# Allegro board dividers.brd
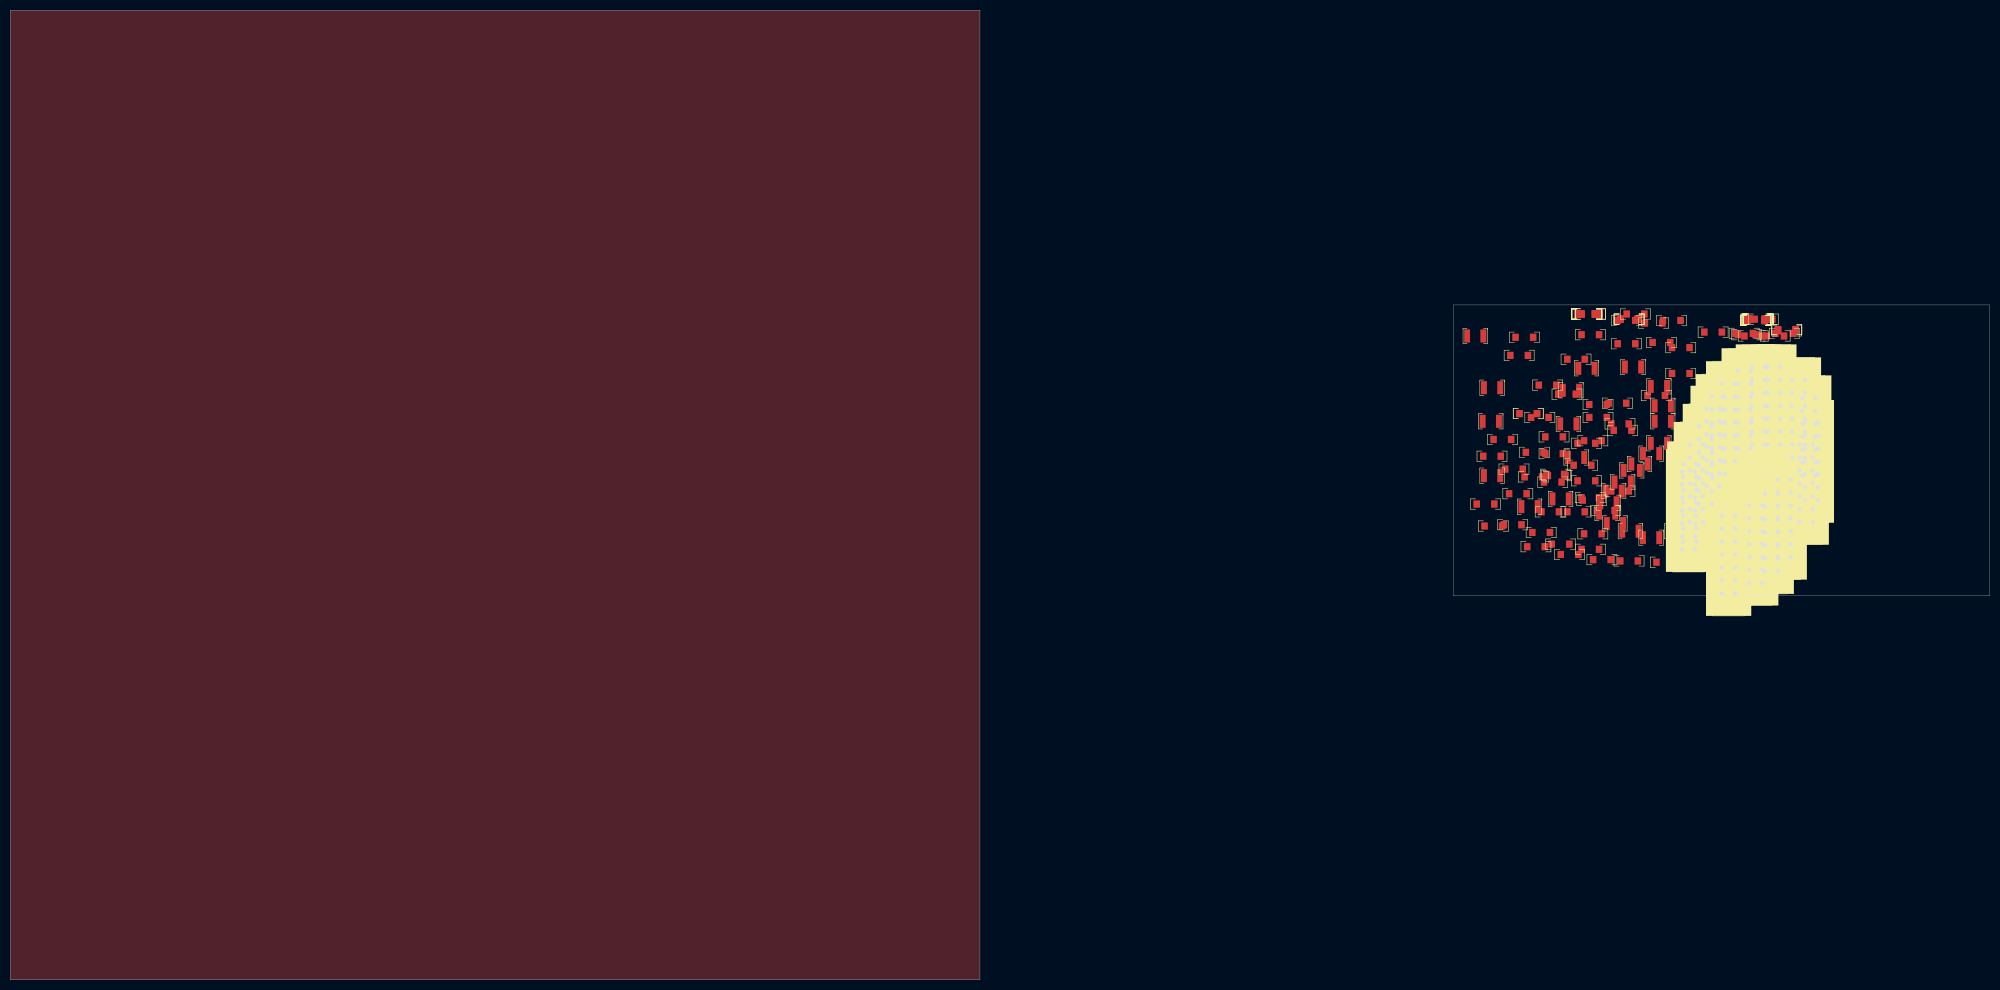
[diagram p0: board, top side]
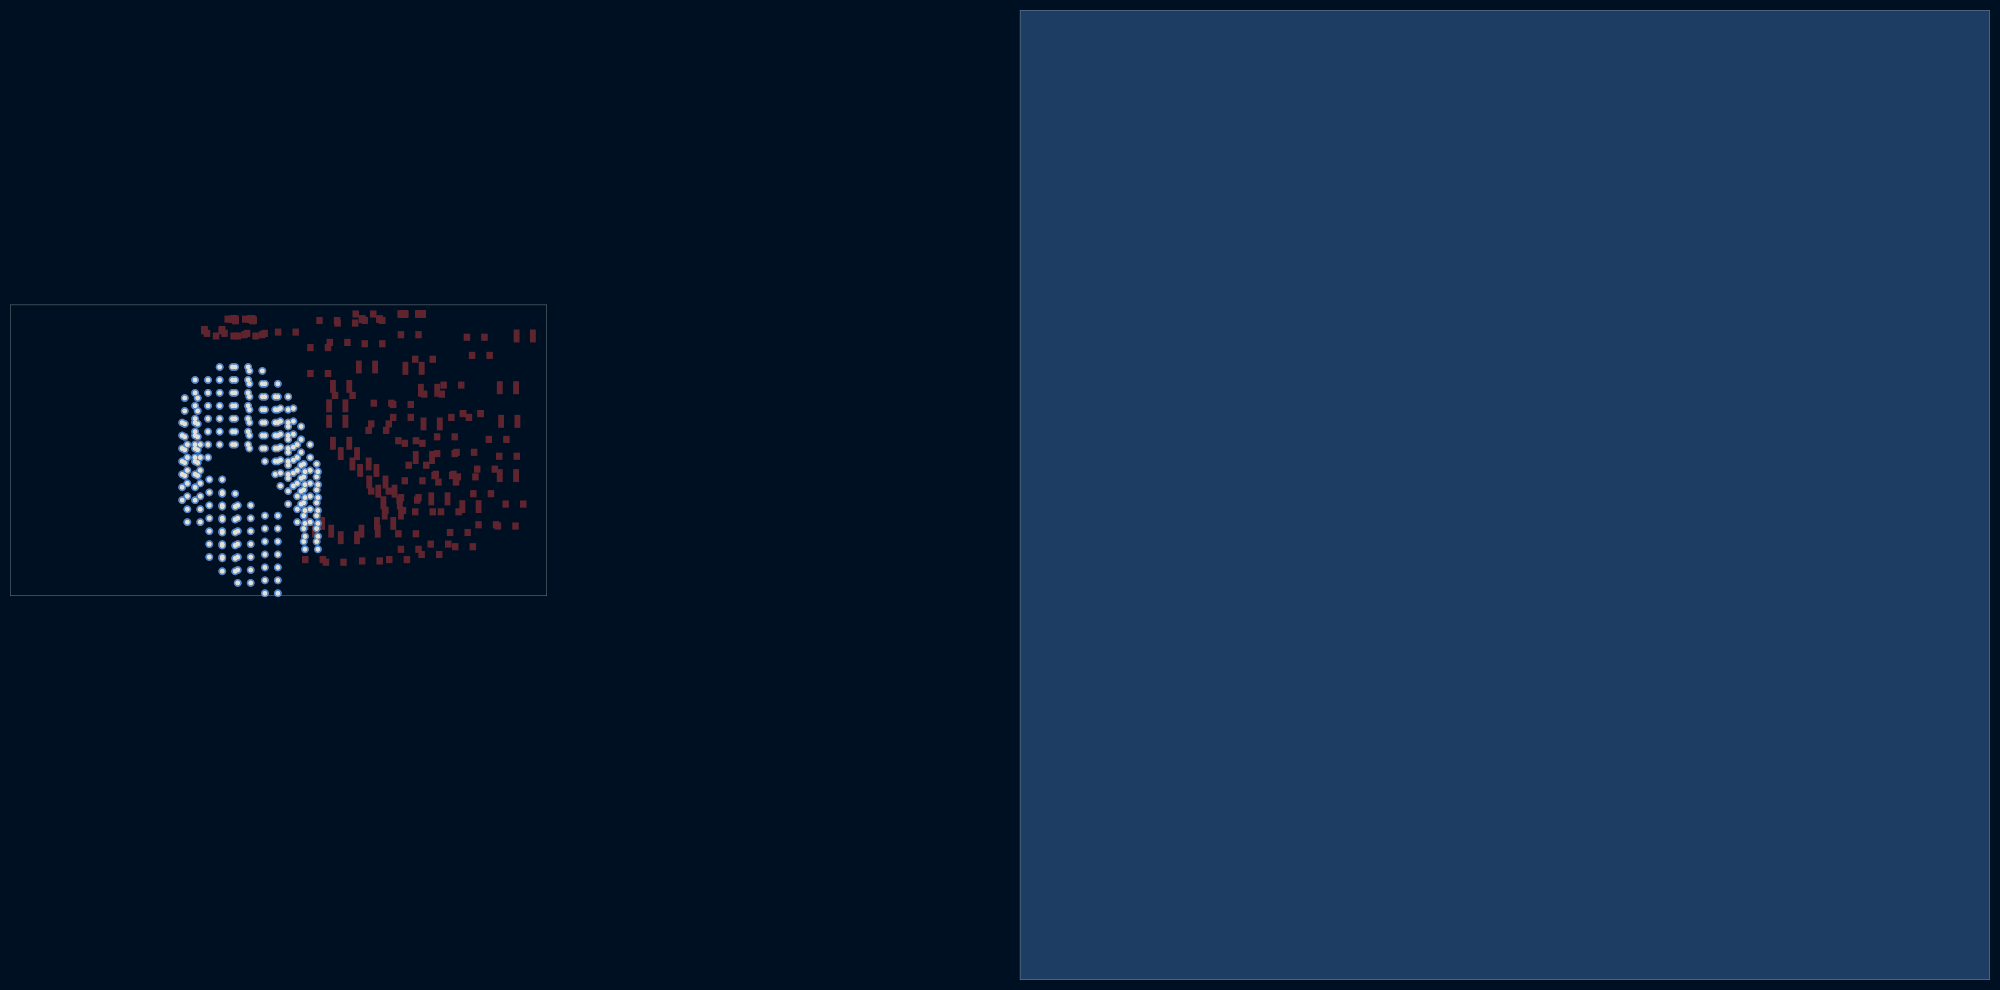
[diagram p1: board, bottom side, seen from below]

Outline 388.87 x 190.5 mm; copper layers: TOP, BOTTOM. Coordinates in mm from the lower left corner of the outline.
Outline path: 0,190.5 190.5,190.5 190.5,0 0,0 0,190.5 ; 283.46,132.59 283.46,75.44 388.87,75.44 388.87,132.59 283.46,132.59

## Placement (name value [footprint] x y rotation side)
C1_1  0.022UF  [C1210]  287.78 126.49 0 top
C1_2  0.022UF  [C1210]  291.08 116.33 0 top
C1_3  0.022UF  [C1210]  290.83 109.73 0 top
C1_4  0.022UF  [C1210]  291.08 99.06 0 top
C1_5  0.022UF  [C1210]  298.45 92.96 0 top
C1_6  0.022UF  [C1210]  304.55 94.49 0 top
C1_7  0.022UF  [C1210]  307.59 102.62 0 top
C1_8  0.022UF  [C1210]  306.07 109.22 0 top
C1_9  0.022UF  [C1210]  306.58 115.82 0 top
C2_1  0.022UF  [C1210]  309.63 120.14 0 top
C2_2  0.022UF  [C1210]  318.77 120.4 0 top
C2_3  0.022UF  [C1210]  323.85 116.59 0 top
C2_4  0.022UF  [C1210]  324.61 112.78 0 top
C2_5  0.022UF  [C1210]  324.61 109.73 0 top
C2_6  0.022UF  [C1210]  323.85 105.41 0 top
C2_7  0.022UF  [C1210]  322.33 103.38 0 top
C2_8  0.022UF  [C1210]  320.04 101.35 0 top
C2_9  0.022UF  [C1210]  318.52 100.08 0 top
C3_1  0.022UF  [C1210]  316.74 97.79 0 top
C3_2  0.022UF  [C1210]  314.96 96.01 0 top
C3_3  0.022UF  [C1210]  313.94 93.73 0 top
C3_4  0.022UF  [C1210]  313.69 91.69 0 top
C3_5  0.022UF  [C1210]  315.21 89.66 0 top
C3_6  0.022UF  [C1210]  318.26 88.14 0 top
C3_7  0.022UF  [C1210]  322.33 86.87 0 top
C3_8  0.022UF  [C1210]  327.41 88.14 0 top
C3_9  0.022UF  [C1210]  329.18 89.66 0 top
J1_1  -  [HDR14]  329.69 92.2 0 top
J1_2  -  [HDR14]  329.95 93.73 0 top
J1_3  -  [HDR14]  331.22 97.54 0 top
J1_4  -  [HDR14]  332.99 101.09 0 top
J1_5  -  [HDR14]  334.52 104.65 0 top
J1_6  -  [HDR14]  335.53 106.93 0 top
J1_7  -  [HDR14]  337.57 109.47 0 top
J1_8  -  [HDR14]  340.61 112.01 0 top
J1_9  -  [HDR14]  343.41 112.78 0 top
J2_1  -  [HDR14]  346.46 112.78 0 top
J2_2  -  [HDR14]  351.28 110.24 0 top
J2_3  -  [HDR14]  353.31 106.68 0 top
J2_4  -  [HDR14]  353.82 101.85 0 top
J2_5  -  [HDR14]  352.81 97.54 0 top
J2_6  -  [HDR14]  348.49 90.68 0 top
J2_7  -  [HDR14]  345.95 87.88 0 top
J2_8  -  [HDR14]  342.9 85.6 0 top
J2_9  -  [HDR14]  337.57 83.57 0 top
R1_1  390K  [R1206]  303.02 97.79 0 top
R1_2  390K  [R1206]  303.28 106.68 0 top
R1_3  390K  [R1206]  300.48 110.49 0 top
R1_4  390K  [R1206]  298.2 111.25 0 top
R1_5  390K  [R1206]  305.82 115.06 0 top
R1_6  390K  [R1206]  296.42 122.68 0 top
R1_7  390K  [R1206]  297.43 126.24 0 top
R1_8  390K  [R1206]  310.39 126.75 0 top
R1_9  390K  [R1206]  322.83 129.03 0 top
R2_1  1.44M  [R1206]  326.39 129.54 0 top
R2_2  1.44M  [R1206]  334.52 127.25 0 top
R2_3  1.44M  [R1206]  340.61 127 0 top
R2_4  1.44M  [R1206]  341.12 126.75 0 top
R2_5  1.44M  [R1206]  342.39 126.49 0 top
R2_6  1.44M  [R1206]  346.71 126.49 0 top
R2_7  1.44M  [R1206]  348.49 127 0 top
R2_8  1.44M  [R1206]  349 127.51 0 top
R2_9  1.44M  [R1206]  349 127.76 0 top
R3_1  1M  [R1206]  349 127.76 0 top
R3_2  1M  [R1206]  344.42 129.79 0 top
R3_3  1M  [R1206]  343.41 129.79 0 top
R3_4  1M  [R1206]  343.41 129.79 0 top
R3_5  1M  [R1206]  343.41 129.79 0 top
R3_6  1M  [R1206]  343.41 129.79 0 top
R3_7  1M  [R1206]  343.15 129.79 0 top
R3_8  1M  [R1206]  343.15 129.79 0 top
R3_9  1M  [R1206]  343.15 129.79 0 top
R4_1  450K  [R1206]  343.15 129.79 0 top
R4_2  450K  [R1206]  342.9 129.79 0 top
R4_3  450K  [R1206]  343.15 129.79 0 top
R4_4  450K  [R1206]  343.15 129.79 0 top
R4_5  450K  [R1206]  342.9 129.54 0 top
R4_6  450K  [R1206]  342.9 129.54 0 top
R4_7  450K  [R1206]  342.9 129.54 0 top
R4_8  450K  [R1206]  342.9 129.54 0 top
R4_9  450K  [R1206]  342.9 129.54 0 top
R5_1  450K  [R1206]  342.9 129.54 0 top
R5_2  450K  [R1206]  342.9 129.54 0 top
R5_3  450K  [R1206]  342.9 129.54 0 top
R5_4  450K  [R1206]  342.9 129.54 0 top
R5_5  450K  [R1206]  342.9 129.54 0 top
R5_6  450K  [R1206]  342.9 129.54 0 top
R5_7  450K  [R1206]  342.9 129.54 0 top
R5_8  450K  [R1206]  342.9 129.54 0 top
R5_9  450K  [R1206]  342.9 129.54 0 top
R6_1  300K  [R1206]  342.9 129.54 0 top
R6_2  300K  [R1206]  342.9 129.54 0 top
R6_3  300K  [R1206]  342.9 129.54 0 top
R6_4  300K  [R1206]  342.9 129.54 0 top
R6_5  300K  [R1206]  342.9 129.54 0 top
R6_6  300K  [R1206]  342.9 129.54 0 top
R6_7  300K  [R1206]  342.9 129.54 0 top
R6_8  300K  [R1206]  309.88 130.81 0 top
R6_9  300K  [R1206]  309.63 130.81 0 top
R7_1  300K  [R1206]  309.63 130.81 0 top
R7_2  300K  [R1206]  309.63 130.81 0 top
R7_3  300K  [R1206]  309.63 130.81 0 top
R7_4  300K  [R1206]  309.63 130.81 0 top
R7_5  300K  [R1206]  309.63 130.81 0 top
R7_6  300K  [R1206]  309.63 130.81 0 top
R7_7  300K  [R1206]  309.63 130.81 0 top
R7_8  300K  [R1206]  309.63 130.81 0 top
R7_9  300K  [R1206]  309.63 130.81 0 top
R8_1  300K  [R1206]  309.63 130.81 0 top
R8_2  300K  [R1206]  309.63 130.81 0 top
R8_3  300K  [R1206]  309.63 130.81 0 top
R8_4  300K  [R1206]  309.63 130.81 0 top
R8_5  300K  [R1206]  309.63 130.81 0 top
R8_6  300K  [R1206]  309.63 130.81 0 top
R8_7  300K  [R1206]  309.63 130.81 0 top
R8_8  300K  [R1206]  309.63 130.81 0 top
R8_9  300K  [R1206]  309.63 130.81 0 top
R9_1  51  [R1206]  310.39 130.81 0 top
R9_2  51  [R1206]  310.39 130.81 0 top
R9_3  51  [R1206]  310.39 130.81 0 top
R9_4  51  [R1206]  317.5 129.54 0 top
R9_5  51  [R1206]  318.01 129.79 0 top
R9_6  51  [R1206]  318.01 129.79 0 top
R9_7  51  [R1206]  318.01 129.79 0 top
R9_8  51  [R1206]  318.01 129.79 0 top
R9_9  51  [R1206]  319.28 130.81 0 top
R10_1  300K  [R1206]  329.18 82.55 0 top
R10_2  300K  [R1206]  325.12 82.04 0 top
R10_3  300K  [R1206]  318.01 82.3 0 top
R10_4  300K  [R1206]  312.67 82.55 0 top
R10_5  300K  [R1206]  306.32 83.57 0 top
R10_6  300K  [R1206]  299.72 85.09 0 top
R10_7  300K  [R1206]  291.34 89.15 0 top
R10_8  300K  [R1206]  289.81 93.47 0 top
R10_9  300K  [R1206]  291.08 102.87 0 top
R11_1  51  [R1206]  293.12 106.17 0 top
R11_2  51  [R1206]  298.2 111.25 0 top
R11_3  51  [R1206]  302.01 116.84 0 top
R11_4  51  [R1206]  307.59 121.92 0 top
R11_5  51  [R1206]  317.5 124.97 0 top
R11_6  51  [R1206]  324.36 125.22 0 top
R11_7  51  [R1206]  328.17 124.21 0 top
R11_8  51  [R1206]  328.17 119.13 0 top
R11_9  51  [R1206]  323.34 114.81 0 top
R12_1  300K  [R1206]  315.72 113.28 0 top
R12_2  300K  [R1206]  311.91 113.03 0 top
R12_3  300K  [R1206]  311.91 110.49 0 top
R12_4  300K  [R1206]  316.23 109.22 0 top
R12_5  300K  [R1206]  316.74 107.95 0 top
R12_6  300K  [R1206]  310.9 105.92 0 top
R12_7  300K  [R1206]  309.63 105.41 0 top
R12_8  300K  [R1206]  299.47 103.63 0 top
R12_9  300K  [R1206]  295.4 100.33 0 top
R13_1  51  [R1206]  296.16 95.5 0 top
R13_2  51  [R1206]  302.51 91.95 0 top
R13_3  51  [R1206]  310.9 87.63 0 top
R13_4  51  [R1206]  310.39 84.58 0 top
R13_5  51  [R1206]  304.55 85.6 0 top
R13_6  51  [R1206]  300.74 87.88 0 top
R13_7  51  [R1206]  295.15 89.41 0 top
R13_8  51  [R1206]  299.21 98.81 0 top
R13_9  51  [R1206]  303.28 103.38 0 top
R14_1  300K  [R1206]  303.53 99.31 0 top
R14_2  300K  [R1206]  303.78 99.06 0 top
R14_3  300K  [R1206]  316.23 96.01 0 top
R14_4  300K  [R1206]  313.44 92.2 0 top
R14_5  300K  [R1206]  309.63 98.04 0 top
R14_6  300K  [R1206]  308.86 101.09 0 top
R14_7  300K  [R1206]  307.59 91.95 0 top
R14_8  300K  [R1206]  310.64 94.23 0 top
R14_9  300K  [R1206]  310.39 94.74 0 top

## Library data of the parts
C1_1-C1_9 C2_1-C2_9 C3_1-C3_9 = CSMD1210: alternate symbols: (C1206); part number: CSMD1210-0.022UF,20%,1210,2KV
J1_1-J1_9 J2_1-J2_9 = CONN14
R1_1-R1_9 = RSMD1206: part number: RSMD1206-390K,5%,1206
R2_1-R2_9 = RSMD1206: part number: RSMD1206-1.44M,5%,1206
R3_1-R3_9 = RSMD1206: part number: RSMD1206-1M,5%,1206
R4_1-R4_9 R5_1-R5_9 = RSMD1206: part number: RSMD1206-450K,5%,1206
R6_1-R6_9 R7_1-R7_9 R8_1-R8_9 R10_1-R10_9 R12_1-R12_9 R14_1-R14_9 = RSMD1206: part number: RSMD1206-300K,5%,1206
R9_1-R9_9 R11_1-R11_9 R13_1-R13_9 = RSMD1206: part number: RSMD1206-51,5%,1206

## Footprints (pads in the part's own frame, mm; a bottom-side part is the same pattern mirrored in y, then rotated)
C1210
  rect 1.143x2.54 smd: 1(-1.587,0) 2(1.612,0)
HDR14
  round 1.524 hole 0.889: 1(-1.27,7.62) 2(1.27,7.62) 3(-1.27,5.08) 4(1.27,5.08) 5(-1.27,2.54) 6(1.27,2.54) 7(-1.27,0) 8(1.27,0) 9(-1.27,-2.54) 10(1.27,-2.54) 11(-1.27,-5.08) 12(1.27,-5.08) 13(-1.27,-7.62) 14(1.27,-7.62)
R1206
  rect 1.27x1.397 smd: 1(-1.727,0) 2(1.727,0)

## Nets
GND_1: C3_1.2(B<0>) J1_1.14 J2_1.14 R14_1.2(B<0>)
GND_2: C3_2.2(B<0>) J1_2.14 J2_2.14 R14_2.2(B<0>)
GND_3: C3_3.2(B<0>) J1_3.14 J2_3.14 R14_3.2(B<0>)
GND_4: C3_4.2(B<0>) J1_4.14 J2_4.14 R14_4.2(B<0>)
GND_5: C3_5.2(B<0>) J1_5.14 J2_5.14 R14_5.2(B<0>)
GND_6: C3_6.2(B<0>) J1_6.14 J2_6.14 R14_6.2(B<0>)
GND_7: C3_7.2(B<0>) J1_7.14 J2_7.14 R14_7.2(B<0>)
GND_8: C3_8.2(B<0>) J1_8.14 J2_8.14 R14_8.2(B<0>)
GND_9: C3_9.2(B<0>) J1_9.14 J2_9.14 R14_9.2(B<0>)
-HV_1: J1_1.1 J2_1.1 R1_1.1(A<0>)
-HV_2: J1_2.1 J2_2.1 R1_2.1(A<0>)
-HV_3: J1_3.1 J2_3.1 R1_3.1(A<0>)
-HV_4: J1_4.1 J2_4.1 R1_4.1(A<0>)
-HV_5: J1_5.1 J2_5.1 R1_5.1(A<0>)
-HV_6: J1_6.1 J2_6.1 R1_6.1(A<0>)
-HV_7: J1_7.1 J2_7.1 R1_7.1(A<0>)
-HV_8: J1_8.1 J2_8.1 R1_8.1(A<0>)
-HV_9: J1_9.1 J2_9.1 R1_9.1(A<0>)
ACC_1: R3_1.1(A<0>)
ACC_2: R3_2.1(A<0>)
ACC_3: R3_3.1(A<0>)
ACC_4: R3_4.1(A<0>)
ACC_5: R3_5.1(A<0>)
ACC_6: R3_6.1(A<0>)
ACC_7: R3_7.1(A<0>)
ACC_8: R3_8.1(A<0>)
ACC_9: R3_9.1(A<0>)
UNNAMED_1_CONN14_I18_5_1: J1_1.5 J2_1.5 R1_1.2(B<0>) R2_1.1(A<0>)
UNNAMED_1_CONN14_I18_5_2: J1_2.5 J2_2.5 R1_2.2(B<0>) R2_2.1(A<0>)
UNNAMED_1_CONN14_I18_5_3: J1_3.5 J2_3.5 R1_3.2(B<0>) R2_3.1(A<0>)
UNNAMED_1_CONN14_I18_5_4: J1_4.5 J2_4.5 R1_4.2(B<0>) R2_4.1(A<0>)
UNNAMED_1_CONN14_I18_5_5: J1_5.5 J2_5.5 R1_5.2(B<0>) R2_5.1(A<0>)
UNNAMED_1_CONN14_I18_5_6: J1_6.5 J2_6.5 R1_6.2(B<0>) R2_6.1(A<0>)
UNNAMED_1_CONN14_I18_5_7: J1_7.5 J2_7.5 R1_7.2(B<0>) R2_7.1(A<0>)
UNNAMED_1_CONN14_I18_5_8: J1_8.5 J2_8.5 R1_8.2(B<0>) R2_8.1(A<0>)
UNNAMED_1_CONN14_I18_5_9: J1_9.5 J2_9.5 R1_9.2(B<0>) R2_9.1(A<0>)
UNNAMED_1_CONN14_I18_6_1: J1_1.6 J2_1.6 R2_1.2(B<0>) R4_1.1(A<0>)
UNNAMED_1_CONN14_I18_6_2: J1_2.6 J2_2.6 R2_2.2(B<0>) R4_2.1(A<0>)
UNNAMED_1_CONN14_I18_6_3: J1_3.6 J2_3.6 R2_3.2(B<0>) R4_3.1(A<0>)
UNNAMED_1_CONN14_I18_6_4: J1_4.6 J2_4.6 R2_4.2(B<0>) R4_4.1(A<0>)
UNNAMED_1_CONN14_I18_6_5: J1_5.6 J2_5.6 R2_5.2(B<0>) R4_5.1(A<0>)
UNNAMED_1_CONN14_I18_6_6: J1_6.6 J2_6.6 R2_6.2(B<0>) R4_6.1(A<0>)
UNNAMED_1_CONN14_I18_6_7: J1_7.6 J2_7.6 R2_7.2(B<0>) R4_7.1(A<0>)
UNNAMED_1_CONN14_I18_6_8: J1_8.6 J2_8.6 R2_8.2(B<0>) R4_8.1(A<0>)
UNNAMED_1_CONN14_I18_6_9: J1_9.6 J2_9.6 R2_9.2(B<0>) R4_9.1(A<0>)
UNNAMED_1_CONN14_I18_7_1: J1_1.7 J2_1.7 R4_1.2(B<0>) R5_1.1(A<0>)
UNNAMED_1_CONN14_I18_7_2: J1_2.7 J2_2.7 R4_2.2(B<0>) R5_2.1(A<0>)
UNNAMED_1_CONN14_I18_7_3: J1_3.7 J2_3.7 R4_3.2(B<0>) R5_3.1(A<0>)
UNNAMED_1_CONN14_I18_7_4: J1_4.7 J2_4.7 R4_4.2(B<0>) R5_4.1(A<0>)
UNNAMED_1_CONN14_I18_7_5: J1_5.7 J2_5.7 R4_5.2(B<0>) R5_5.1(A<0>)
UNNAMED_1_CONN14_I18_7_6: J1_6.7 J2_6.7 R4_6.2(B<0>) R5_6.1(A<0>)
UNNAMED_1_CONN14_I18_7_7: J1_7.7 J2_7.7 R4_7.2(B<0>) R5_7.1(A<0>)
UNNAMED_1_CONN14_I18_7_8: J1_8.7 J2_8.7 R4_8.2(B<0>) R5_8.1(A<0>)
UNNAMED_1_CONN14_I18_7_9: J1_9.7 J2_9.7 R4_9.2(B<0>) R5_9.1(A<0>)
UNNAMED_1_CONN14_I18_8_1: J1_1.8 J2_1.8 R5_1.2(B<0>) R6_1.1(A<0>)
UNNAMED_1_CONN14_I18_8_2: J1_2.8 J2_2.8 R5_2.2(B<0>) R6_2.1(A<0>)
UNNAMED_1_CONN14_I18_8_3: J1_3.8 J2_3.8 R5_3.2(B<0>) R6_3.1(A<0>)
UNNAMED_1_CONN14_I18_8_4: J1_4.8 J2_4.8 R5_4.2(B<0>) R6_4.1(A<0>)
UNNAMED_1_CONN14_I18_8_5: J1_5.8 J2_5.8 R5_5.2(B<0>) R6_5.1(A<0>)
UNNAMED_1_CONN14_I18_8_6: J1_6.8 J2_6.8 R5_6.2(B<0>) R6_6.1(A<0>)
UNNAMED_1_CONN14_I18_8_7: J1_7.8 J2_7.8 R5_7.2(B<0>) R6_7.1(A<0>)
UNNAMED_1_CONN14_I18_8_8: J1_8.8 J2_8.8 R5_8.2(B<0>) R6_8.1(A<0>)
UNNAMED_1_CONN14_I18_8_9: J1_9.8 J2_9.8 R5_9.2(B<0>) R6_9.1(A<0>)
UNNAMED_1_CONN14_I18_9_1: J1_1.9 J2_1.9 R6_1.2(B<0>) R7_1.1(A<0>)
UNNAMED_1_CONN14_I18_9_2: J1_2.9 J2_2.9 R6_2.2(B<0>) R7_2.1(A<0>)
UNNAMED_1_CONN14_I18_9_3: J1_3.9 J2_3.9 R6_3.2(B<0>) R7_3.1(A<0>)
UNNAMED_1_CONN14_I18_9_4: J1_4.9 J2_4.9 R6_4.2(B<0>) R7_4.1(A<0>)
UNNAMED_1_CONN14_I18_9_5: J1_5.9 J2_5.9 R6_5.2(B<0>) R7_5.1(A<0>)
UNNAMED_1_CONN14_I18_9_6: J1_6.9 J2_6.9 R6_6.2(B<0>) R7_6.1(A<0>)
UNNAMED_1_CONN14_I18_9_7: J1_7.9 J2_7.9 R6_7.2(B<0>) R7_7.1(A<0>)
UNNAMED_1_CONN14_I18_9_8: J1_8.9 J2_8.9 R6_8.2(B<0>) R7_8.1(A<0>)
UNNAMED_1_CONN14_I18_9_9: J1_9.9 J2_9.9 R6_9.2(B<0>) R7_9.1(A<0>)
UNNAMED_1_CONN14_I18_10_1: J1_1.10 J2_1.10 R7_1.2(B<0>) R8_1.1(A<0>)
UNNAMED_1_CONN14_I18_10_2: J1_2.10 J2_2.10 R7_2.2(B<0>) R8_2.1(A<0>)
UNNAMED_1_CONN14_I18_10_3: J1_3.10 J2_3.10 R7_3.2(B<0>) R8_3.1(A<0>)
UNNAMED_1_CONN14_I18_10_4: J1_4.10 J2_4.10 R7_4.2(B<0>) R8_4.1(A<0>)
UNNAMED_1_CONN14_I18_10_5: J1_5.10 J2_5.10 R7_5.2(B<0>) R8_5.1(A<0>)
UNNAMED_1_CONN14_I18_10_6: J1_6.10 J2_6.10 R7_6.2(B<0>) R8_6.1(A<0>)
UNNAMED_1_CONN14_I18_10_7: J1_7.10 J2_7.10 R7_7.2(B<0>) R8_7.1(A<0>)
UNNAMED_1_CONN14_I18_10_8: J1_8.10 J2_8.10 R7_8.2(B<0>) R8_8.1(A<0>)
UNNAMED_1_CONN14_I18_10_9: J1_9.10 J2_9.10 R7_9.2(B<0>) R8_9.1(A<0>)
UNNAMED_1_CONN14_I18_11_1: J1_1.11 J2_1.11 R9_1.2(B<0>)
UNNAMED_1_CONN14_I18_11_2: J1_2.11 J2_2.11 R9_2.2(B<0>)
UNNAMED_1_CONN14_I18_11_3: J1_3.11 J2_3.11 R9_3.2(B<0>)
UNNAMED_1_CONN14_I18_11_4: J1_4.11 J2_4.11 R9_4.2(B<0>)
UNNAMED_1_CONN14_I18_11_5: J1_5.11 J2_5.11 R9_5.2(B<0>)
UNNAMED_1_CONN14_I18_11_6: J1_6.11 J2_6.11 R9_6.2(B<0>)
UNNAMED_1_CONN14_I18_11_7: J1_7.11 J2_7.11 R9_7.2(B<0>)
UNNAMED_1_CONN14_I18_11_8: J1_8.11 J2_8.11 R9_8.2(B<0>)
UNNAMED_1_CONN14_I18_11_9: J1_9.11 J2_9.11 R9_9.2(B<0>)
UNNAMED_1_CONN14_I18_12_1: J1_1.12 J2_1.12 R3_1.2(B<0>) R11_1.2(B<0>)
UNNAMED_1_CONN14_I18_12_2: J1_2.12 J2_2.12 R3_2.2(B<0>) R11_2.2(B<0>)
UNNAMED_1_CONN14_I18_12_3: J1_3.12 J2_3.12 R3_3.2(B<0>) R11_3.2(B<0>)
UNNAMED_1_CONN14_I18_12_4: J1_4.12 J2_4.12 R3_4.2(B<0>) R11_4.2(B<0>)
UNNAMED_1_CONN14_I18_12_5: J1_5.12 J2_5.12 R3_5.2(B<0>) R11_5.2(B<0>)
UNNAMED_1_CONN14_I18_12_6: J1_6.12 J2_6.12 R3_6.2(B<0>) R11_6.2(B<0>)
UNNAMED_1_CONN14_I18_12_7: J1_7.12 J2_7.12 R3_7.2(B<0>) R11_7.2(B<0>)
UNNAMED_1_CONN14_I18_12_8: J1_8.12 J2_8.12 R3_8.2(B<0>) R11_8.2(B<0>)
UNNAMED_1_CONN14_I18_12_9: J1_9.12 J2_9.12 R3_9.2(B<0>) R11_9.2(B<0>)
UNNAMED_1_CONN14_I18_13_1: J1_1.13 J2_1.13 R13_1.2(B<0>)
UNNAMED_1_CONN14_I18_13_2: J1_2.13 J2_2.13 R13_2.2(B<0>)
UNNAMED_1_CONN14_I18_13_3: J1_3.13 J2_3.13 R13_3.2(B<0>)
UNNAMED_1_CONN14_I18_13_4: J1_4.13 J2_4.13 R13_4.2(B<0>)
UNNAMED_1_CONN14_I18_13_5: J1_5.13 J2_5.13 R13_5.2(B<0>)
UNNAMED_1_CONN14_I18_13_6: J1_6.13 J2_6.13 R13_6.2(B<0>)
UNNAMED_1_CONN14_I18_13_7: J1_7.13 J2_7.13 R13_7.2(B<0>)
UNNAMED_1_CONN14_I18_13_8: J1_8.13 J2_8.13 R13_8.2(B<0>)
UNNAMED_1_CONN14_I18_13_9: J1_9.13 J2_9.13 R13_9.2(B<0>)
UNNAMED_1_CSMD1210_I15_A_1: C1_1.1(A<0>) R8_1.2(B<0>) R9_1.1(A<0>) R10_1.1(A<0>)
UNNAMED_1_CSMD1210_I15_A_2: C1_2.1(A<0>) R8_2.2(B<0>) R9_2.1(A<0>) R10_2.1(A<0>)
UNNAMED_1_CSMD1210_I15_A_3: C1_3.1(A<0>) R8_3.2(B<0>) R9_3.1(A<0>) R10_3.1(A<0>)
UNNAMED_1_CSMD1210_I15_A_4: C1_4.1(A<0>) R8_4.2(B<0>) R9_4.1(A<0>) R10_4.1(A<0>)
UNNAMED_1_CSMD1210_I15_A_5: C1_5.1(A<0>) R8_5.2(B<0>) R9_5.1(A<0>) R10_5.1(A<0>)
UNNAMED_1_CSMD1210_I15_A_6: C1_6.1(A<0>) R8_6.2(B<0>) R9_6.1(A<0>) R10_6.1(A<0>)
UNNAMED_1_CSMD1210_I15_A_7: C1_7.1(A<0>) R8_7.2(B<0>) R9_7.1(A<0>) R10_7.1(A<0>)
UNNAMED_1_CSMD1210_I15_A_8: C1_8.1(A<0>) R8_8.2(B<0>) R9_8.1(A<0>) R10_8.1(A<0>)
UNNAMED_1_CSMD1210_I15_A_9: C1_9.1(A<0>) R8_9.2(B<0>) R9_9.1(A<0>) R10_9.1(A<0>)
UNNAMED_1_CSMD1210_I15_B_1: C1_1.2(B<0>) C2_1.1(A<0>) R10_1.2(B<0>) R11_1.1(A<0>) R12_1.1(A<0>)
UNNAMED_1_CSMD1210_I15_B_2: C1_2.2(B<0>) C2_2.1(A<0>) R10_2.2(B<0>) R11_2.1(A<0>) R12_2.1(A<0>)
UNNAMED_1_CSMD1210_I15_B_3: C1_3.2(B<0>) C2_3.1(A<0>) R10_3.2(B<0>) R11_3.1(A<0>) R12_3.1(A<0>)
UNNAMED_1_CSMD1210_I15_B_4: C1_4.2(B<0>) C2_4.1(A<0>) R10_4.2(B<0>) R11_4.1(A<0>) R12_4.1(A<0>)
UNNAMED_1_CSMD1210_I15_B_5: C1_5.2(B<0>) C2_5.1(A<0>) R10_5.2(B<0>) R11_5.1(A<0>) R12_5.1(A<0>)
UNNAMED_1_CSMD1210_I15_B_6: C1_6.2(B<0>) C2_6.1(A<0>) R10_6.2(B<0>) R11_6.1(A<0>) R12_6.1(A<0>)
UNNAMED_1_CSMD1210_I15_B_7: C1_7.2(B<0>) C2_7.1(A<0>) R10_7.2(B<0>) R11_7.1(A<0>) R12_7.1(A<0>)
UNNAMED_1_CSMD1210_I15_B_8: C1_8.2(B<0>) C2_8.1(A<0>) R10_8.2(B<0>) R11_8.1(A<0>) R12_8.1(A<0>)
UNNAMED_1_CSMD1210_I15_B_9: C1_9.2(B<0>) C2_9.1(A<0>) R10_9.2(B<0>) R11_9.1(A<0>) R12_9.1(A<0>)
UNNAMED_1_CSMD1210_I16_A_1: C2_1.2(B<0>) C3_1.1(A<0>) R12_1.2(B<0>) R13_1.1(A<0>) R14_1.1(A<0>)
UNNAMED_1_CSMD1210_I16_A_2: C2_2.2(B<0>) C3_2.1(A<0>) R12_2.2(B<0>) R13_2.1(A<0>) R14_2.1(A<0>)
UNNAMED_1_CSMD1210_I16_A_3: C2_3.2(B<0>) C3_3.1(A<0>) R12_3.2(B<0>) R13_3.1(A<0>) R14_3.1(A<0>)
UNNAMED_1_CSMD1210_I16_A_4: C2_4.2(B<0>) C3_4.1(A<0>) R12_4.2(B<0>) R13_4.1(A<0>) R14_4.1(A<0>)
UNNAMED_1_CSMD1210_I16_A_5: C2_5.2(B<0>) C3_5.1(A<0>) R12_5.2(B<0>) R13_5.1(A<0>) R14_5.1(A<0>)
UNNAMED_1_CSMD1210_I16_A_6: C2_6.2(B<0>) C3_6.1(A<0>) R12_6.2(B<0>) R13_6.1(A<0>) R14_6.1(A<0>)
UNNAMED_1_CSMD1210_I16_A_7: C2_7.2(B<0>) C3_7.1(A<0>) R12_7.2(B<0>) R13_7.1(A<0>) R14_7.1(A<0>)
UNNAMED_1_CSMD1210_I16_A_8: C2_8.2(B<0>) C3_8.1(A<0>) R12_8.2(B<0>) R13_8.1(A<0>) R14_8.1(A<0>)
UNNAMED_1_CSMD1210_I16_A_9: C2_9.2(B<0>) C3_9.1(A<0>) R12_9.2(B<0>) R13_9.1(A<0>) R14_9.1(A<0>)

Pads without a net: J1_1 2 3 4; J1_2 2 3 4; J1_3 2 3 4; J1_4 2 3 4; J1_5 2 3 4; J1_6 2 3 4; J1_7 2 3 4; J1_8 2 3 4; J1_9 2 3 4; J2_1 2 3 4; J2_2 2 3 4; J2_3 2 3 4; J2_4 2 3 4; J2_5 2 3 4; J2_6 2 3 4; J2_7 2 3 4; J2_8 2 3 4; J2_9 2 3 4

## Copper pours and planes (outline as drawn; the poured copper is in the pictures)
Net_1 on BOTTOM: 190.5,0 190.5,190.5 0,190.5 0,0
Net_2 on TOP: 0,190.5 0,0 190.5,0 190.5,190.5
